# EAGLE board GWLSensorv3 (EAGLE 9.5.2)
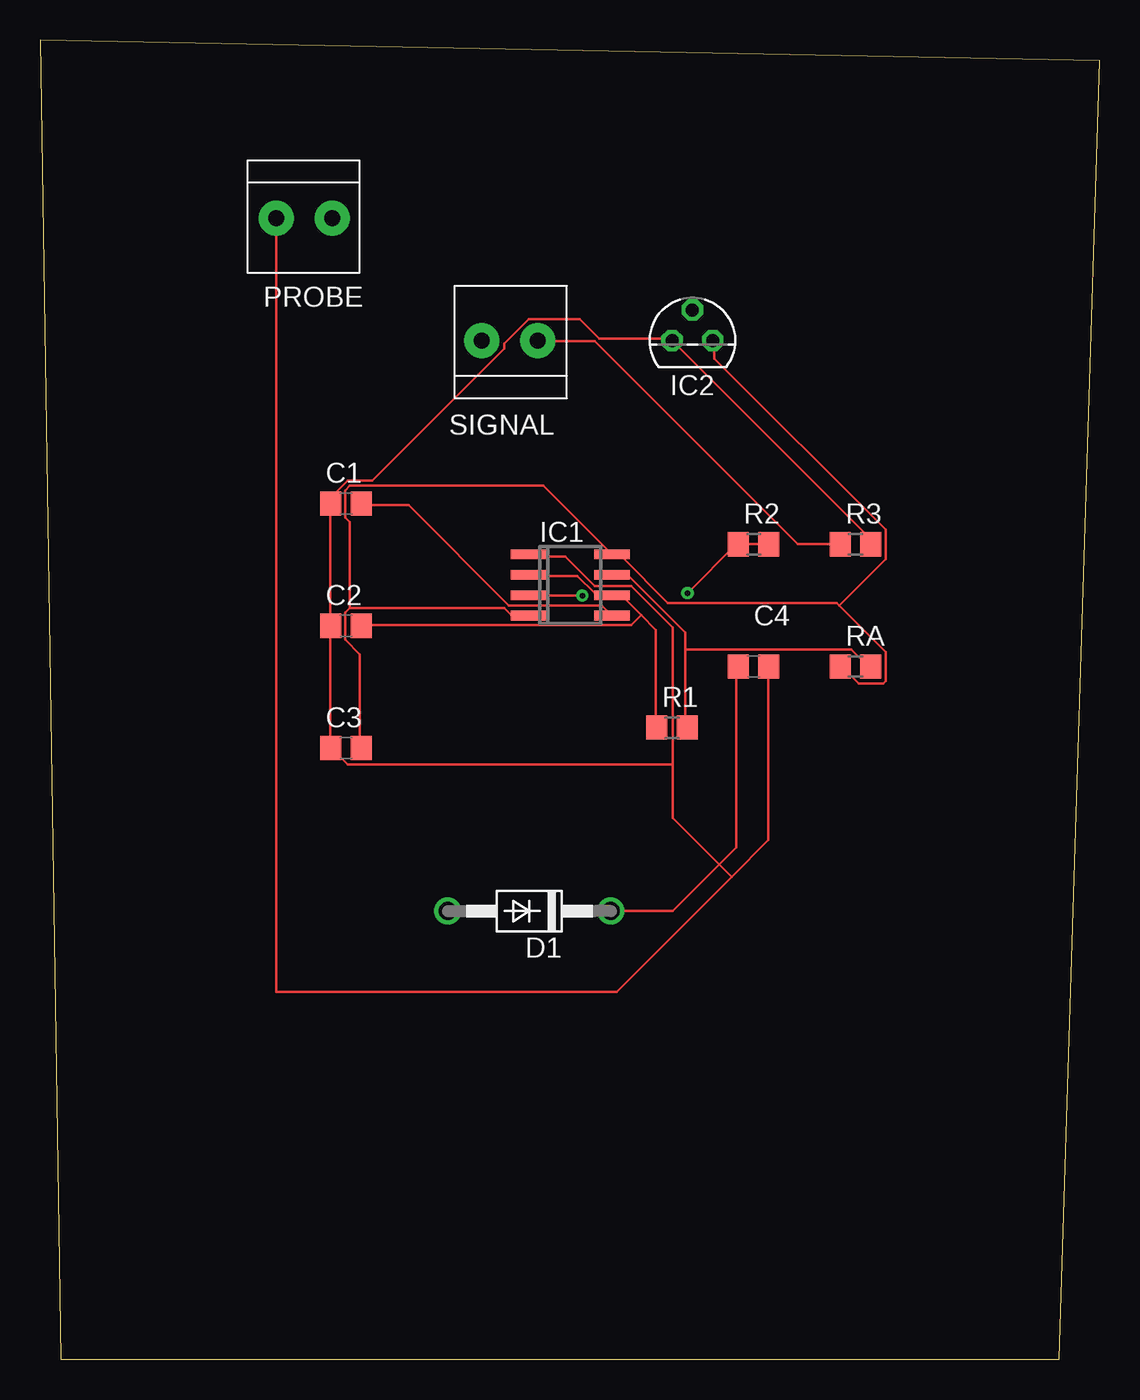
[diagram p0: board, top side]
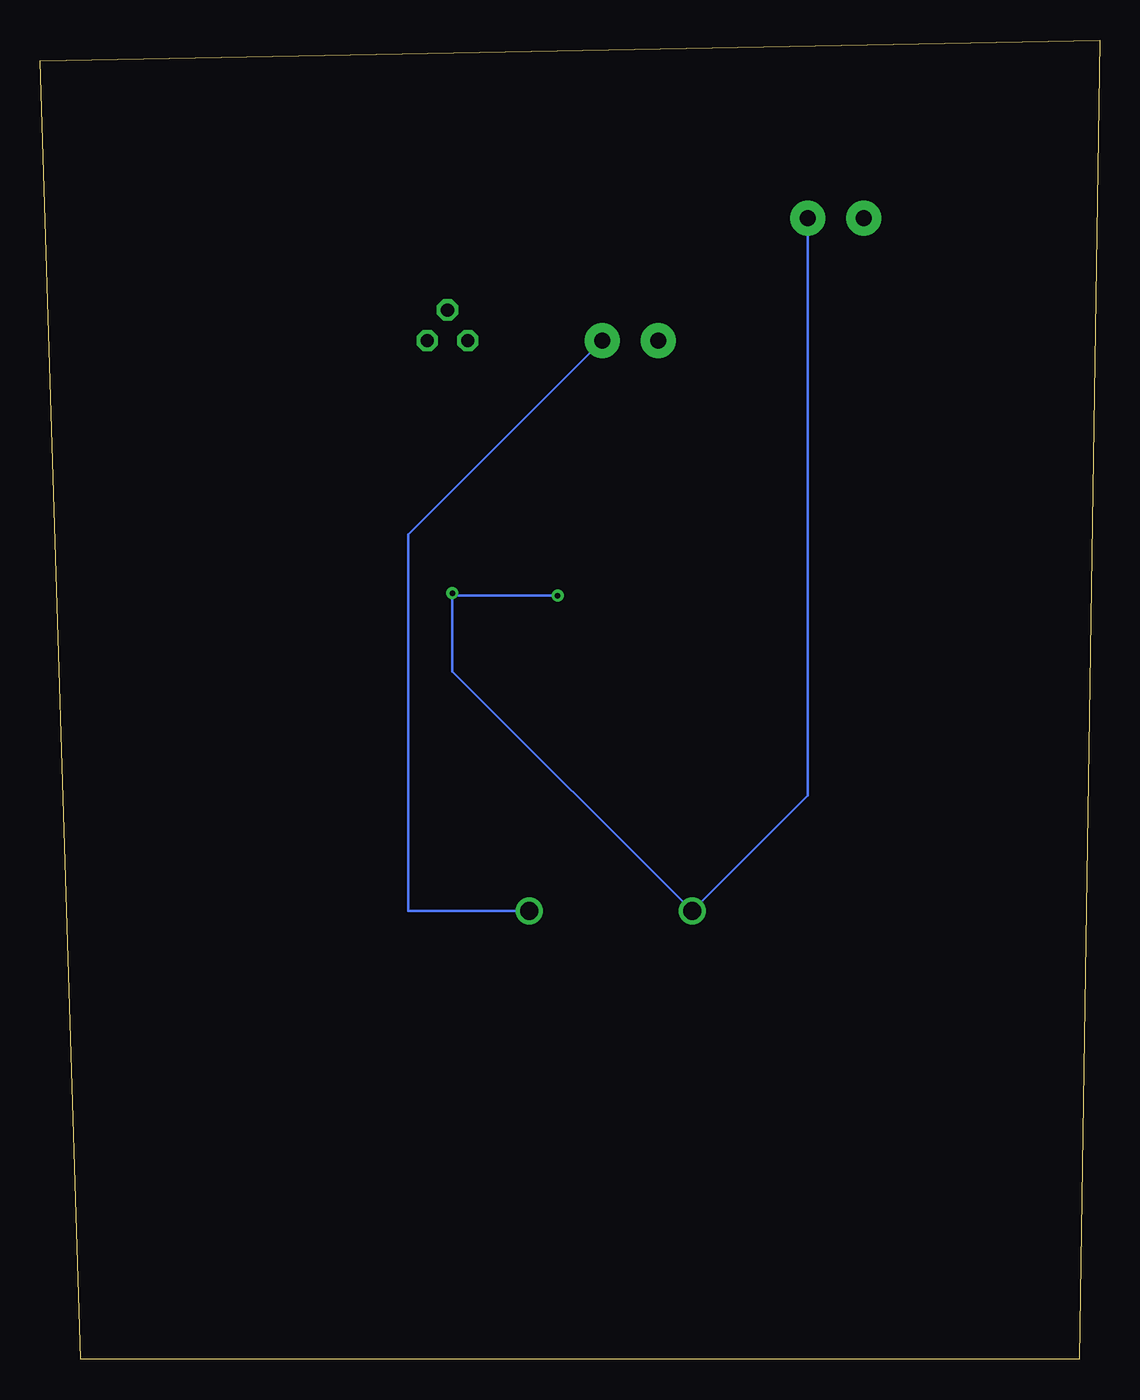
[diagram p1: board, bottom side, seen from below]

Size 66.02 x 82.22 mm. Coordinates in mm from the lower left corner, seen from the top.
Outline: 1.27,0 63.48,0 66.02,80.95 0,82.22 1.27,0
Copper layers (1*16): Top 0.035mm / dielectric 1.5mm / Bottom 0.035mm
Design rules "default": minimum track width 6mil, minimum drill 0.35mm, track to track 6mil, track to pad 6mil, pad to pad 6mil, via to via 6mil, smd to smd 6mil, copper to edge 40mil, drill to drill 6mil, minimum pad ring 10mil, minimum via ring 8mil, stop-mask expansion 4mil, vias tented up to drill 0mil, thermal gap 10mil

## Footprints (pad centres in the part's own frame; a part is rotated, then mirrored left to right if it is on the bottom)
C0805 = smd 1.3 x 1.5: 1 -0.95,0; 2 0.95,0
DO41-10 = drill 1.118: A 5.08,0; C -5.08,0
SO08 = smd 0.6 x 2.2: 1 -1.905,-2.6; 2 -0.635,-2.6; 3 0.635,-2.6; 4 1.905,-2.6; 5 1.905,2.6; 6 0.635,2.6; 7 -0.635,2.6; 8 -1.905,2.6
TO92 = drill 0.813 octagon: 1 -1.27,0; 2 0,1.905; 3 1.27,0
1X2-3.5MM = drill 1 pad 2.184: 1 1.8,0; 2 -1.7,0
R0805 = smd 1.3 x 1.5: 1 -0.95,0; 2 0.95,0

## Placement (x,y rotation side)
C1  10nf  [C0805]  19.05,53.34 0 top
C2  470pf  [C0805]  19.05,45.72 0 top
C3  100nf  [C0805]  19.05,38.1 0 top
C4  1n  [C0805]  44.45,43.18 0 top
D1  1N4004  [DO41-10]  30.48,27.94 180 top
IC1  LM555D  [SO08]  33.02,48.26 270 top
IC2  [TO92]  40.64,63.5 0 top
PROBE  1X2-3.5MM  [1X2-3.5MM]  16.51,71.12 180 top
R1  1K6  [R0805]  39.37,39.37 0 top
R2  1K6  [R0805]  44.45,50.8 0 top
R3  1K6  [R0805]  50.8,50.8 0 top
RA  330  [R0805]  50.8,43.18 0 top
SIGNAL  1X2-3.5MM  [1X2-3.5MM]  29.21,63.5 0 top

## Library data of the parts
C1-C4 R1-R3 RA = rcl
D1 = diode
IC1 IC2 = linear
PROBE SIGNAL = adafruit

## Nets
GND: C1.1 C2.1 C3.1 C4.2 IC1.1 IC2.1 PROBE.1 R3.2
N$1: C4.1 D1.C R3.1 SIGNAL.1
N$2: C2.2 IC1.2 IC1.6 R1.1
N$3: IC1.7 R1.2 RA.2
N$4: C1.2 IC1.5
N$5: D1.A IC1.3 PROBE.2 R2.1 R2.2
N$6: C3.2 IC1.4 IC1.8 IC2.3 RA.1
VCC: IC2.2

## Tracks (layer width: path | path; a pad name or v marks a point on that pad's centre or on a via)
GND
  Top 0.152: R3.2 51.61,50.8 51.61,51.26 IC2.1 39.27,63.6 34.85,63.6 33.63,64.82 30.43,64.82 28.91,63.3 28.91,62.99 20.68,54.76 19.15,54.76 18.24,53.85 18.24,53.39 C1.1 18.09,53.24 18.09,45.77 C2.1 18.09,45.62 18.09,38.15 C3.1 18.24,38 19.15,37.08 39.42,37.08 | 43.08,30.07 35.92,22.91 14.71,22.91 PROBE.1 | 43.08,30.07 45.36,32.36 45.36,43.18 C4.2 | 39.42,37.08 39.42,33.73 43.08,30.07 | 39.42,37.08 39.42,45.62 36.83,48.21 34.54,48.21 32.72,50.04 30.43,50.04 IC1.1
N$1
  Top 0.152: C4.1 43.38,43.18 43.38,31.9 39.42,27.94 D1.C | R3.1 47.19,50.8 34.54,63.45 31.04,63.45 SIGNAL.1
  Bottom 0.152: D1.C 43.08,27.94 43.08,51.41 31.04,63.45 SIGNAL.1
N$2
  Top 0.152: 37.44,46.38 36.22,47.6 35.76,47.6 IC1.6 35.61,47.75 34.54,47.75 33.48,48.82 30.43,48.82 IC1.2 | 37.44,46.38 38.35,45.47 38.35,39.37 R1.1 | 37.44,46.38 36.83,45.77 20.07,45.77 C2.2
N$3
  Top 0.152: 40.18,44.25 40.18,45.31 36.68,48.82 35.76,48.82 IC1.7 | 40.18,44.25 40.18,39.37 R1.2 | 40.18,44.25 50.55,44.25 51.61,43.18 RA.2
N$4
  Top 0.152: C1.2 20.07,53.24 22.96,53.24 29.21,46.99 35,46.99 35.61,46.38 IC1.5
N$5  (via drill 0.35)
  Top 0.152: R2.2 R2.1 43.38,50.8 v40.34,47.75 | v33.78,47.6 30.43,47.6 IC1.3
  Bottom 0.152: 40.34,47.6 40.34,42.88 D1.A 18.21,35.13 PROBE.2 | 40.34,47.6 v33.78,47.6 | 40.34,47.6 v40.34,47.75
N$6
  Top 0.152: 19.3,46.84 19,46.53 19,44.86 19.91,43.94 19.91,38.15 C3.2 | 19.3,46.84 28.91,46.84 29.36,46.38 30.28,46.38 IC1.4 | 49.78,46.99 49.63,47.14 39.12,47.14 36.22,50.04 35.76,50.04 IC1.8 35.61,50.19 31.34,54.46 19.3,54.46 19,54.15 19,52.48 19.3,52.17 19.3,46.84 | 49.78,46.99 52.68,44.09 52.68,42.27 52.53,42.11 51,42.11 49.94,43.18 RA.1 | 49.78,46.99 52.68,49.89 52.68,51.71 42.01,62.38 42.01,63.45 IC2.3